# Altium PCB Lambda-Sensor-Driver.PcbDoc
Units mm, origin at the board's own origin, x right, y up, seen from the top; angles counter-clockwise.
Board outline 78 x 67 mm, 2 copper layers (Top Layer, Bottom Layer), stack 1.544 mm thick; 52 components, 45 nets, 190 pads, 16 vias.
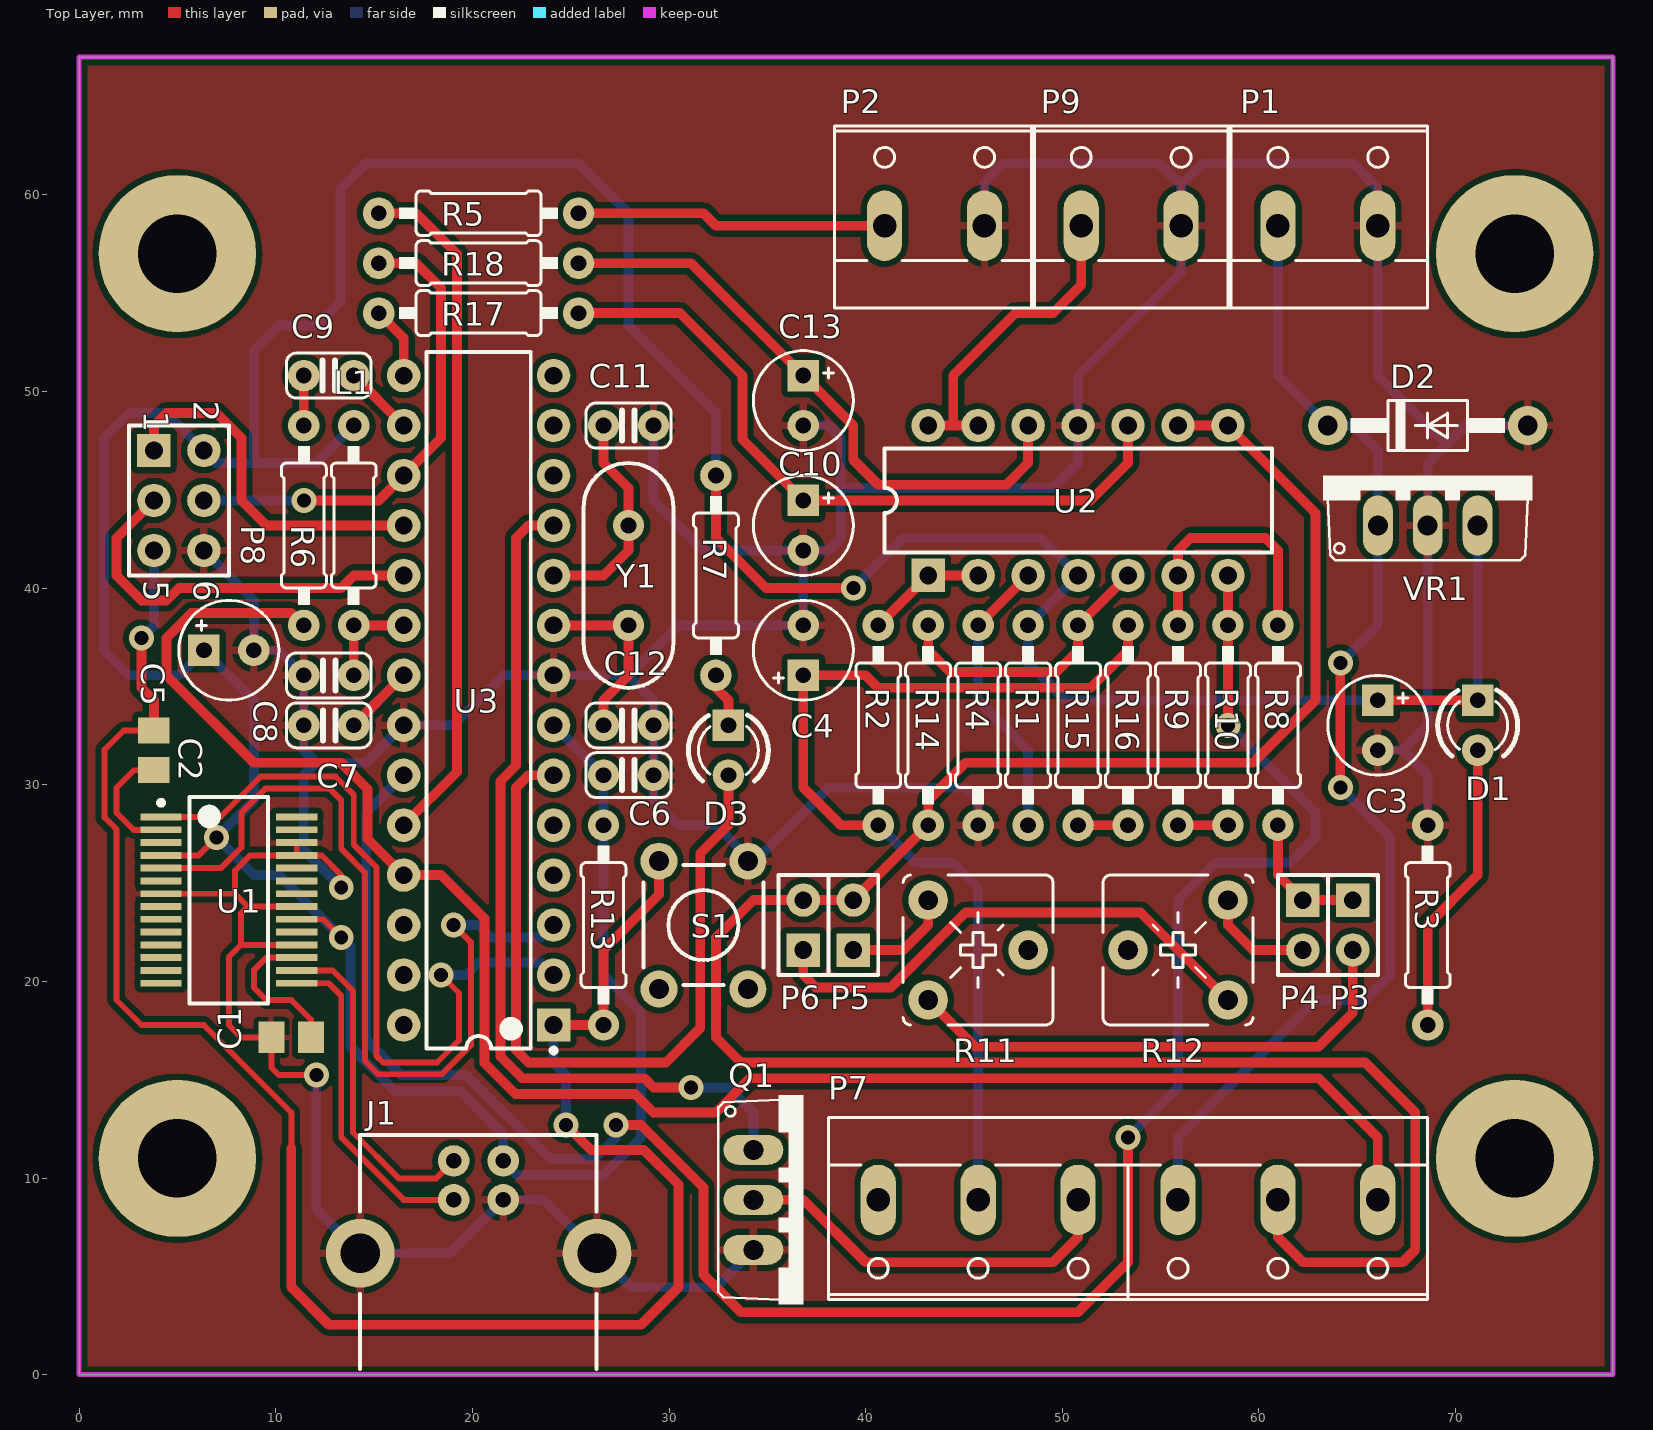
[diagram p0: Top Layer view]
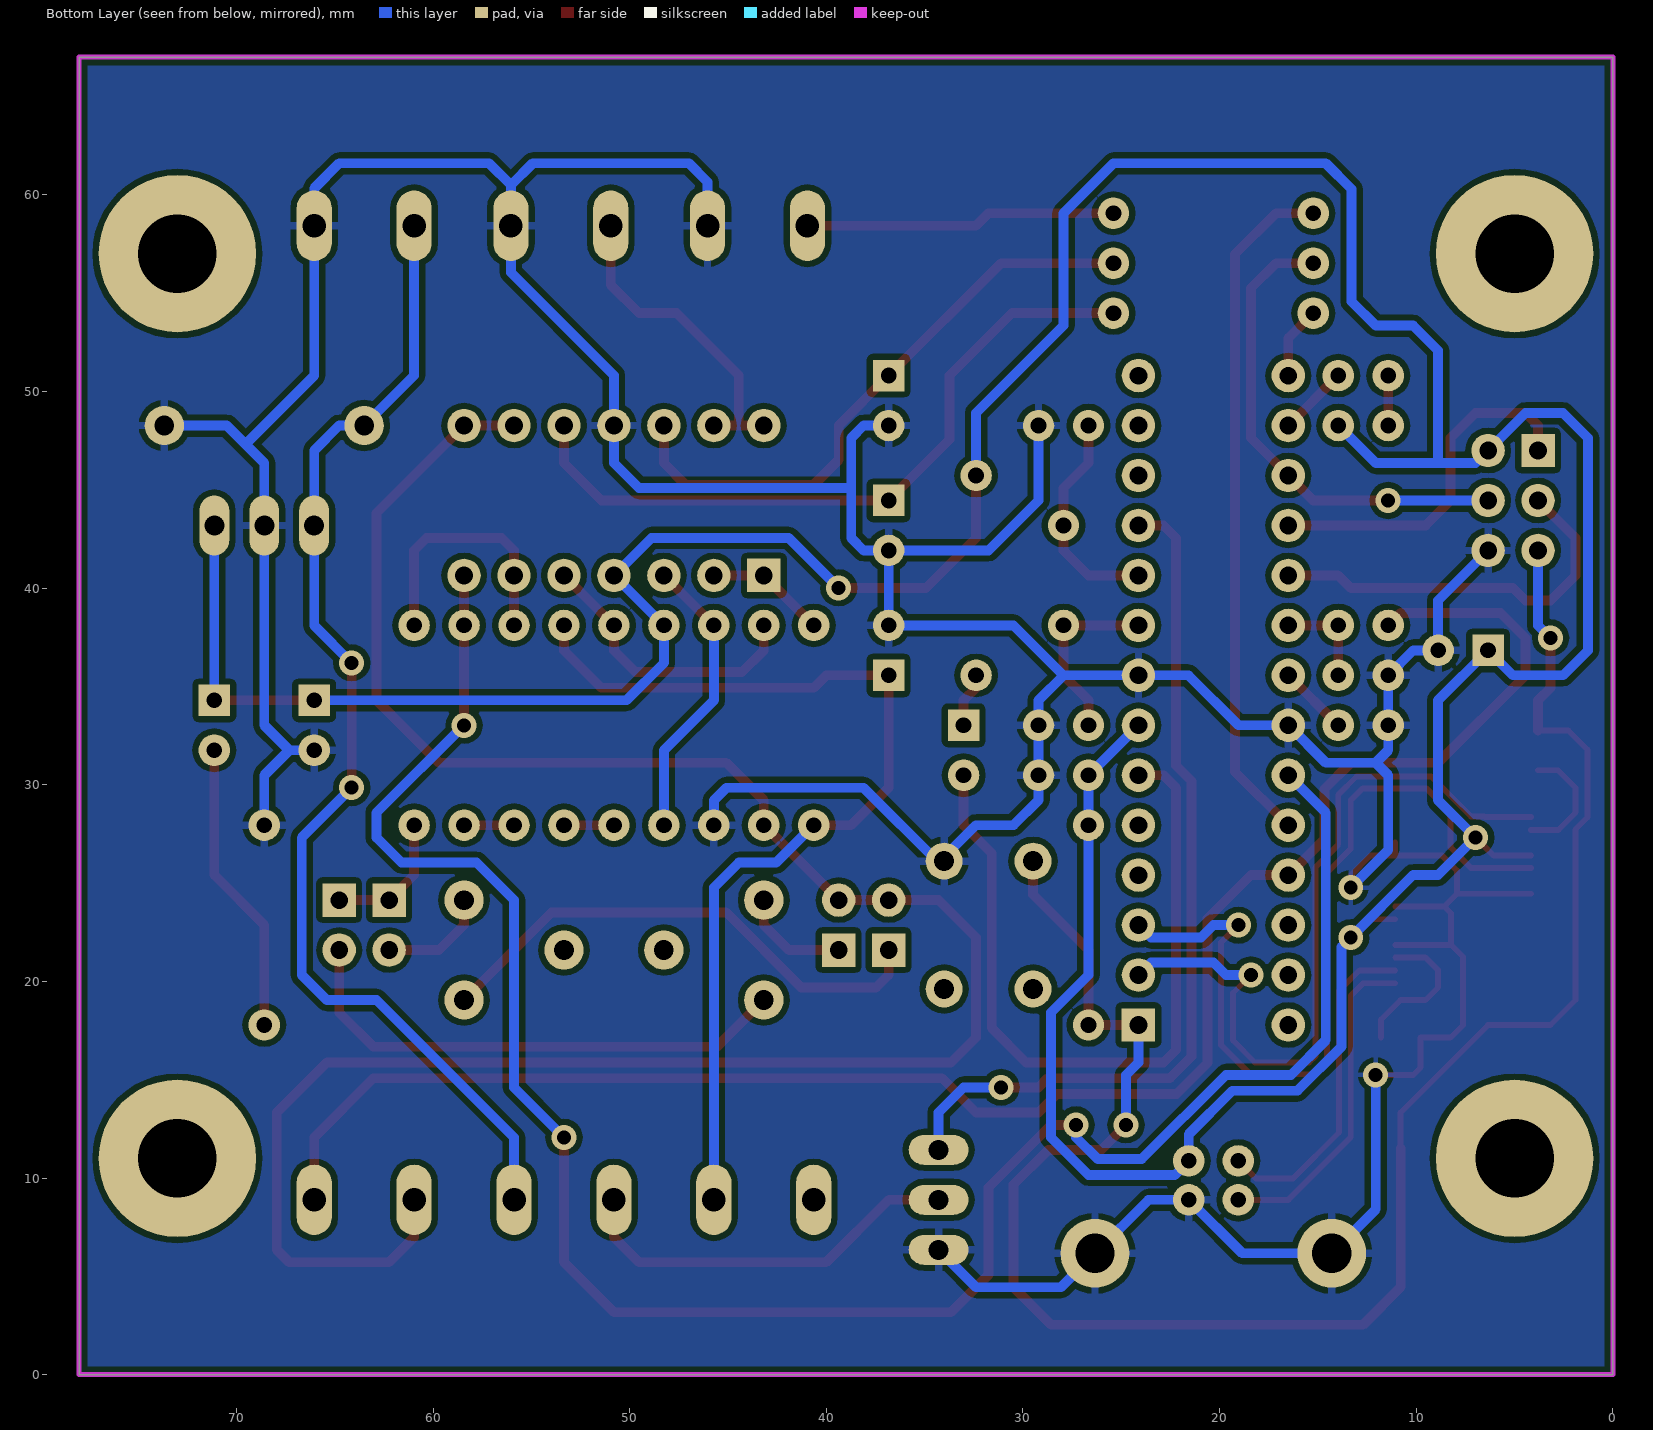
[diagram p1: Bottom Layer view, seen from below]

## Layer stack, top to bottom
Top Solder: solder mask 0.0102, Solder Resist, Dk 3.5
Top Layer: signal copper 0.0356
Dielectric 1: dielectric 1.4732, FR-4, Dk 4.8
Bottom Layer: signal copper 0.0356
Bottom Solder: solder mask 0.0102, Solder Resist, Dk 3.5

## Board outline
0,0 0,67 78,67 78,0

## Design rules (kind name [scope] priority, off if disabled: settings)
Clearance Clearance_2 [InNamedPolygon('Bottom - GND')] p1: gap=0.3 ignorepadtopadclearanceinfootprint=FALSE
Clearance Clearance_1 [InNamedPolygon('Top - GND')] p2: gap=0.3 ignorepadtopadclearanceinfootprint=FALSE
Clearance [All] p3: gap=0.3 ignorepadtopadclearanceinfootprint=FALSE
ComponentClearance [All] p1: gap=0 collisioncheckmode=3 verticalgap=0 showdistances=FALSE
PolygonConnect PolygonConnect_2 [All vs IsNamedPolygon('Top - GND')] p1: thpad.connectstyle=Relief thpad.reliefconductorwidth=0.4 thpad.reliefentries=4 thpad.polygonreliefangle="90 Angle" thpad.airgapwidth=0.3 smdpad.connectstyle=Relief smdpad.reliefconductorwidth=0.254 smdpad.reliefentries=4 smdpad.polygonreliefangle="90 Angle" smdpad.airgapwidth=0.254 via.connectstyle=Relief via.reliefconductorwidth=0.254 via.reliefentries=4 via.polygonreliefangle="90 Angle" via.airgapwidth=0.254
PolygonConnect PolygonConnect_1 [All vs IsNamedPolygon('Bottom - GND')] p2: thpad.connectstyle=Relief thpad.reliefconductorwidth=0.4 thpad.reliefentries=4 thpad.polygonreliefangle="90 Angle" thpad.airgapwidth=0.3 smdpad.connectstyle=Relief smdpad.reliefconductorwidth=0.254 smdpad.reliefentries=4 smdpad.polygonreliefangle="90 Angle" smdpad.airgapwidth=0.254 via.connectstyle=Relief via.reliefconductorwidth=0.254 via.reliefentries=4 via.polygonreliefangle="90 Angle" via.airgapwidth=0.254
PolygonConnect [All] p3: connectstyle=Relief reliefconductorwidth=0.254 reliefentries=4 polygonreliefangle="90 Angle" airgapwidth=0.254
RoomDefinition Lambda-Sensor-Driver [InComponentClass('Lambda-Sensor-Driver')] p1: confinementstyle=ConfineIn formatcopy=TRUE lockcomponents=FALSE outline -0.143,-6.35 78,-6.35 78,67.31 -0.143,67.31
RoutingVias [All] p1: holewidth=0.711 width=1.27 viastyle="Through Hole" minholewidth=0.711 minwidth=1.27 maxholewidth=0.711 maxwidth=1.27
SolderMaskExpansion [All] p1: expansion=0.102
Width [All] p1: maxlimit=1 minlimit=0.3 preferedwidth=0.5
29 further rules are at their usual default settings.

## Components (designator, comment, footprint, x,y, rotation, side; value= is the part's Value field where it differs from the comment)
C1 "100nF" C0805 10.795,17.145 r180 top
C2 "100nF" C0805 3.81,31.75 r270 top
C3 "10uF" E2,5-5 66.04,33.02 r270 top
C4 "10uF" E2,5-5 36.83,36.83 r90 top
C5 "100uF" E2,5-5 7.62,36.83 r0 top
C6 "100nF" C025-024X044 27.94,30.48 r180 top
C7 "100nF" C025-024X044 12.7,33.02 r0 top
C8 "100nF" C025-024X044 12.7,35.56 r0 top
C9 "100nF" C025-024X044 12.7,50.8 r180 top
C10 "1uF" E2,5-5 36.83,43.18 r270 top
C11 "22pF" C025-024X044 27.94,48.26 r180 top
C12 "22pF" C025-024X044 27.94,33.02 r180 top
C13 "1uF" E2,5-5 36.83,49.53 r270 top
D1 "LED0" LED3MM 71.12,33.02 r270 top
D2 "1N4002" DO41-10 68.58,48.26 r0 top
D3 "LED0" LED3MM 33.02,31.75 r270 top
J1 "Type B" USB-B-PTH 20.32,8.89 r90 top
L1 "10uH" 0207/10 13.97,43.18 r90 top
P1 "Header 2" W237-132 63.5,59.055 r0 top
P2 "Header 2" W237-132 43.5,59.055 r0 top
P3 "Header 2" HDR1X2 64.77,24.13 r270 top
P4 "Header 2" HDR1X2 62.23,24.13 r270 top
P5 "Header 2" HDR1X2 39.37,21.59 r90 top
P6 "Header 2" HDR1X2 36.83,21.59 r90 top
P7 "Header 5" W237-6P 53.34,8.255 r180 top
P8 "Header 3X2" HDR2X3 3.81,46.99 r270 top
P9 "Header 2" W237-132 53.5,59.055 r0 top
Q1 "IRF640N" TO220V 36.83,8.89 r270 top
R1 "18K" 0207/10 48.26,33.02 r90 top
R2 "100" 0207/10 40.64,33.02 r90 top
R3 "220" 0207/10 68.58,22.86 r270 top
R4 "10K" 0207/10 45.72,33.02 r90 top
R5 "22K" 0207/10 20.32,59.055 r180 top
R6 "6K8" 0207/10 11.43,43.18 r90 top
R7 "330" 0207/10 32.385,40.64 r270 top
R8 "22K" 0207/10 60.96,33.02 r270 top
R9 "12K" 0207/10 55.88,33.02 r90 top
R10 "100K" 0207/10 58.42,33.02 r270 top
R11 "300" CA6V 45.72,21.59 r270 top
R12 "300" CA6V 55.88,21.59 r90 top
R13 "10K" 0207/10 26.67,22.86 r270 top
R14 "22K" 0207/10 43.18,33.02 r270 top
R15 "12K" 0207/10 50.8,33.02 r90 top
R16 "100K" 0207/10 53.34,33.02 r270 top
R17 "10K" 0207/10 20.32,53.975 r0 top
R18 "10K" 0207/10 20.32,56.515 r0 top
S1 "SW-PB" TACTILE-PTH 31.75,22.86 r270 top
U1 "FT232RL-Tube" SSOP-28_N 7.62,24.13 r0 top
U2 "LM324AN" 646-06 50.8,44.45 r0 top
U3 "ATmega328P-PU" 28P3 20.32,34.29 r180 top
VR1 "Volt Reg" TO220V 68.58,45.72 r0 top
Y1 "16MHz" HC49US 27.94,40.64 r90 top

## Footprints (in the part's own frame and the unit in brackets; to place one, negate y for a bottom-side part, rotate by r counter-clockwise, add the part's x,y. Pads: shape width x height; smd on the part's side, far side on the other; paste and mask are expansions set on the pad)
28P3 [mm] "DIP, 28-Leads, Row Spacing 7.62mm, Pitch 2.54mm, Body 34.67x7.3mm"
  rect 1.7x1.7 hole 0.9: 1(-3.81,16.51)
  round 1.7 hole 0.9: 2(-3.81,13.97) 3(-3.81,11.43) 4(-3.81,8.89) 5(-3.81,6.35) 6(-3.81,3.81) 7(-3.81,1.27) 8(-3.81,-1.27) 9(-3.81,-3.81) 10(-3.81,-6.35) 11(-3.81,-8.89) 12(-3.81,-11.43) 13(-3.81,-13.97) 14(-3.81,-16.51) 15(3.81,-16.51) 16(3.81,-13.97) 17(3.81,-11.43) 18(3.81,-8.89) 19(3.81,-6.35) 20(3.81,-3.81) 21(3.81,-1.27) 22(3.81,1.27) 23(3.81,3.81) 24(3.81,6.35) 25(3.81,8.89) 26(3.81,11.43) 27(3.81,13.97) 28(3.81,16.51)
  silkscreen extent -3.94,-17.7 2.65,17.93, body extent -3.6,-17.65 3.6,17.65, height 4.58
0207/10 [mm]
  round 1.6 hole 0.8: 1(-5.08,0) 2(5.08,0)
  silkscreen extent -4.04,-1.14 4.04,1.14
646-06 [mm] "DIP; 14 Leads; Row Spacing 7.62 mm; Pitch 2.54 mm"
  rect 1.7x1.7 hole 0.9: 1(-7.62,-3.81)
  round 1.7 hole 0.9: 2(-5.08,-3.81) 3(-2.54,-3.81) 4(0,-3.81) 5(2.54,-3.81) 6(5.08,-3.81) 7(7.62,-3.81) 8(7.62,3.81) 9(5.08,3.81) 10(2.54,3.81) 11(0,3.81) 12(-2.54,3.81) 13(-5.08,3.81) 14(-7.62,3.81)
  silkscreen extent -9.85,-2.65 9.85,2.65
C025-024X044 [mm]
  round 1.6 hole 0.8: 1(-1.27,0) 2(1.27,0)
  silkscreen extent -2.16,-1.14 2.16,1.14
C0805 [mil]
  rect 52x63 smd: 1(-39.37,0) 2(40,0)
  body extent -39,-25 39,25, height 31
CA6V [mm]
  round 2 hole 1: 1(-2.54,-2.54) 2(2.54,-2.54) 3(0,2.54)
  silkscreen extent -3.81,-3.81 3.81,3.81
DO41-10 [mm]
  round 2 hole 1: 1(5.08,0) 2(-5.08,0)
  silkscreen extent -3.94,-1.27 3.94,1.27
E2,5-5 [mil]
  rect 63x63 hole 31.5: 1(-50,0)
  round 63 hole 31.5: 2(50,0)
  silkscreen extent -100,-100 100,100
HC49US [mm]
  round 1.6 hole 0.8: 1(-2.54,0) 2(2.54,0)
  silkscreen extent -5.71,-2.29 5.71,2.29, body extent -5.55,-2.32 5.62,2.35, height 3.63
HDR1X2 [mm] "Connector; Header; 2 Position"
  rect 1.7x1.7 hole 0.9: 1(0,0)
  round 1.7 hole 0.9: 2(2.54,0)
  silkscreen extent -1.27,-1.27 3.81,1.27
HDR2X3 [mm] "Connector; Header; 3x2 Position"
  rect 1.7x1.7 hole 0.9: 1(0,0)
  round 1.7 hole 0.9: 2(0,2.54) 3(2.54,0) 4(2.54,2.54) 5(5.08,0) 6(5.08,2.54)
  silkscreen extent -1.27,-1.27 6.35,3.81
LED3MM [mm]
  rect 1.6x1.6 hole 0.8: 1(-1.27,0)
  round 1.6 hole 0.8: 2(1.27,0)
  silkscreen extent -1.79,-2.03 1.57,2.03
SSOP-28_N [mm] "SOP, 28-Leads, Body 10.2x5.3mm, Pitch 0.65mm, IPC Medium Density"
  rect 2.1x0.35 smd: 1(-3.45,4.225) 2(-3.45,3.575) 3(-3.45,2.925) 4(-3.45,2.275) 5(-3.45,1.625) 6(-3.45,0.975) 7(-3.45,0.325) 8(-3.45,-0.325) 9(-3.45,-0.975) 10(-3.45,-1.625) 11(-3.45,-2.275) 12(-3.45,-2.925) 13(-3.45,-3.575) 14(-3.45,-4.225) 15(3.45,-4.225) 16(3.45,-3.575) 17(3.45,-2.925) 18(3.45,-2.275) 19(3.45,-1.625) 20(3.45,-0.975) 21(3.45,-0.325) 22(3.45,0.325) 23(3.45,0.975) 24(3.45,1.625) 25(3.45,2.275) 26(3.45,2.925) 27(3.45,3.575) 28(3.45,4.225)
  silkscreen extent -3.57,-5.25 2,5.25, body extent -2.8,-5.25 2.8,5.25, height 2
TACTILE-PTH [mil]
  round 74 hole 40: 1(-128,89) 2(-128,-89) 3(128,89) 4(128,-89)
  silkscreen extent -120,-120 120,120
TO220V [mil]
  oval 60x120 hole 40: 1(-100,-100) 2(0,-100) 3(100,-100)
  silkscreen extent -210,-170 210,0
USB-B-PTH [mm]
  round 1.6 hole 0.8: 1(1.981,-1.25) 2(1.981,1.27) 3(0,1.27) 4(0,-1.25)
  round 3.5 hole 2: 5(-2.718,-6.02) 6(-2.718,6.02)
  silkscreen extent -8.6,-6 3.3,6.02, body extent -12.7,-6 4.3,6, height 11
W237-6P [mil]
  oval 70.5x141 hole 47: 1(-500,-25) 2(-300,-25) 3(-100,-25) 4(100,-25) 5(300,-25) 6(500,-25)
  silkscreen extent -600,-190 600,175, body extent -597,-213 597,200, height 551
W237-132 [mil]
  oval 70.5x141 hole 47: 1(-100,-25) 2(100,-25)
  silkscreen extent -200,-190 200,175, body extent -197,-213 197,200, height 551

## Part data
C1 C2 C6 C7 C8 C9 C11 C12: library part Cap, "Capacitor", LatestRevisionDate=17-Jul-2002, LatestRevisionNote="Re-released for DXP Platform.", PackageDescription="Radial Cap, Thru-Hole; 2 Leads; 0.3 in Pin Spacing", PackageReference=RAD-0.3, Published=8-Jun-2000, Publisher="Altium Limited"
C3 C4 C5 C10 C13: library part "Cap Pol1", "Polarized Capacitor (Radial)", LatestRevisionDate=17-Jul-2002, LatestRevisionNote="Re-released for DXP Platform.", PackageDescription="Polarized Capacitor (Radial); 2 Leads", PackageReference=RB7.6-15, Published=8-Jun-2000, Publisher="Altium Limited"
D1 D3: "Typical INFRARED GaAs LED", LatestRevisionDate=08-Jul-2005, LatestRevisionNote="Mech Layer 1 removed.", PackageDescription="LED; 2 Leads", PackageReference=LED-0, Published=8-Jun-2000, Publisher="Altium Limited"
D2: library part Diode, "Default Diode", Code_JEDEC=DO-214-AB, LatestRevisionDate=17-Jul-2002, LatestRevisionNote="Re-released for DXP Platform.", PackageDescription="DO-214-AB/SMC; 2 C-Bend Leads; Body 7.9 x 5.9 mm, inc. leads (LxW)", PackageReference=SMC, PackageVersion=Sep-1996, Published=8-Jun-2000, Publisher="Altium Limited"
J1: library part USB, Category=Connector, Link=http://www.sfe-electronics.com/product.php?category=12&product_id=156, Price=2250, Type=USB
L1: library part Inductor, "Inductor", Code_IEC=1005, Code_JEITA=0402, LatestRevisionDate=29-May-2009, LatestRevisionNote="IPC-7351 Footprint Added.", PackageDescription="Chip Inductor", PackageReference=0402-A, Published=8-Jun-2000, Publisher="Altium Limited"
P1 P2 P3 P4 P5 P6 P9: "Header, 2-Pin", LatestRevisionDate=17-Jul-2002, LatestRevisionNote="Re-released for DXP Platform.", Publisher="Altium Limited"
P7: "Header, 5-Pin", LatestRevisionDate=17-Jul-2002, LatestRevisionNote="Re-released for DXP Platform.", Publisher="Altium Limited"
P8: "Header, 3-Pin, Dual row", LatestRevisionDate=17-Jul-2002, LatestRevisionNote="Re-released for DXP Platform.", Publisher="Altium Limited"
Q1: library part MOSFET-N, "N-Channel MOSFET", LatestRevisionDate=17-Jul-2002, LatestRevisionNote="Re-released for DXP Platform.", PackageDescription="TO, Flat Index; 3 In-Line, Axial Leads; Body Dia. 4.6mm; Lead Dia. 0.5 mm (max)", PackageReference=E3, PackageVersion=1995/1996, Published=8-Jun-2000, Publisher="Altium Limited"
R1 R2 R3 R4 R5 R6 R7 R8 R9 R10 R13 R14 R15 R16 R17 R18: library part Res1, "Resistor", LatestRevisionDate=17-Jul-2002, LatestRevisionNote="Re-released for DXP Platform.", PackageDescription="Axial Device, Thru-Hole; 2 Leads; 0.3 in Pin Spacing", PackageReference=AXIAL-0.3, Published=8-Jun-2000, Publisher="Altium Limited"
R11 R12: library part "Res Adj1", "Variable Resistor", LatestRevisionDate=17-Jul-2002, LatestRevisionNote="Re-released for DXP Platform.", PackageDescription="Axial Device, Thru-Hole; 2 Leads; 0.7 in Pin Spacing", PackageReference=AXIAL-0.7, Published=8-Jun-2000, Publisher="Altium Limited", Set Position=0.5
S1: "Switch", LatestRevisionDate=17-Jul-2002, LatestRevisionNote="Re-released for DXP Platform.", PackageDescription="Switch; 2 Leads", PackageReference=SPST-2, Published=24-Mar-1999, Publisher="Altium Limited"
U1: "USB UART Asynchronous Serial Data Transfer Chip, SSOP-28, Tube", ComponentLink1Description="Manufacturer Link", ComponentLink1URL=http://www.ftdichip.com/Products/ICs/FT232R.htm, ComponentLink2Description=Datasheet, ComponentLink2URL=http://www.ftdichip.com/Support/Documents/DataSheets/ICs/DS_FT232R.pdf, DatasheetVersion="ver 2.07, Jul-2010", PackageDescription="28-Pin Small Outline Package 0.65 mm Pitch", PackageReference=SSOP-28, PackageVersion=2010, Published=19-Aug-2010, Publisher="Altium Limited"
U2: "Quad Low-Power Operational Amplifier", ComponentLink1Description="Manufacturer Link", ComponentLink1URL=http://www.onsemi.com/site/products/parametrics/0,4446,251,00.html, ComponentLink2Description=Datasheet, ComponentLink2URL=http://www.onsemi.com/pub/Collateral/LM324-D.PDF, DatasheetVersion=1988, LatestRevisionDate=06-Jun-2005, LatestRevisionNote="Stylized 3D Model Added.", PackageDescription="DIP; 14 Leads; Row Spacing 7.62 mm; Pitch 2.54 mm", PackageReference=646-06, PackageVersion=1997, Published=17-Jul-2002, Publisher="Altium Limited"
U3: "8-bit AVR Microcontroller, 32KB Flash, 1KB EEPROM, 2KB SRAM, 28-pin PDIP, Industrial Grade (-40°C to 85°C)", Supplier Part Number 1=ATMEGA328P-PU-ND, ComponentLink1Description="Manufacturer Link", ComponentLink1URL=http://www.atmel.com/products/avr/default.asp?, ComponentLink2Description="ATmega48A/48PA/88A/88PA/168A/168PA/328/328P Datasheet", ComponentLink2URL=http://www.atmel.com/dyn/resources/prod_documents/8271.pdf, ComponentLink3Description="ATmega48A/48PA/88A/88PA/168A/168PA/328/328P Summary", ComponentLink3URL=http://www.atmel.com/dyn/resources/prod_documents/8271S.pdf, ComponentLink4Description="Atmel.com Home", ComponentLink4URL=http://www.atmel.com, DatasheetVersion="revA, Jan-2010", PackageDescription="28-lead (0.300\"/7.62mm Wide) Plastic Dual Inline Package (PDIP)", PackageReference=28P3, PackageVersion="revB, Sep-2001", Published=1-Apr-2010, Publisher="Altium Limited", Supplier 1=Digi-Key, Supplier 2=Farnell, Supplier 3=Mouser, Supplier Part Number 2=1715487, Supplier Part Number 3=556-ATMEGA328P-PU
VR1: "Voltage Regulator", LatestRevisionDate=29-May-2009, LatestRevisionNote="IPC-7351 Footprint Added.", PackageDescription="3-Pin Transistor Outline Package 2.54 mm Pitch, 15.1 mm Lead Span", PackageReference=D2PAK, Published=24-Mar-1999, Publisher="Altium Limited"
Y1: library part XTAL, "Crystal Oscillator", LatestRevisionDate=17-Jul-2002, LatestRevisionNote="Re-released for DXP Platform.", PackageDescription="Crystal, Thru-Hole; 2 Leads; Body 3.1 x 8.2 mm (Dia.xH)", PackageReference=R38, Published=8-Jun-2000, Publisher="Altium Limited"

## Free pads (board coordinates)
  round 8 hole 4: ""(5,11) ""(5,57) ""(73,11) ""(73,57)

## Via types
v1: diameter 1.27, hole 0.711, Top Layer to Bottom Layer, 16 vias

## Nets (pads, with @x,y where several pads share a name; then routed paths per layer and width w, separated by ;. In a path a pad name is that pad's centre, name@x,y a point inside that pad or via, vN(x,y) a via of type N, cw(c..) or ccw(c..) an arc to the next point about the centre after c; other vN are vias at no path point)
12V: D2.2 P1.1 P7.3 VR1.1 | length 60.2
  Top Layer w0.5: v1(64.135,29.845) v1(64.135,36.195)
  Bottom Layer w0.5: P7.3 55.88,12.065 62.865,19.05 65.405,19.05 66.675,20.32 66.675,27.305 v1(64.135,29.845) ; P1.1 60.96,50.8 D2.2 64.77,48.26 66.04,46.99 VR1.1 66.04,38.1 v1(64.135,36.195)
AUX_INPUT: R5.2 U3.24 | length 35
  Top Layer w0.5: R5.2 17.145,59.055 19.215,56.985 19.215,30.645 U3.24
GND: C1.2 C3.2 C4.2 C5.2 C6.1 C7.1 C8.1 C10.2 C11.1 C12.1 C13.2 D2.1 J1.4 J1.5 J1.6 P1.2 P2.2 P8.6 P9.2 Q1.3 R3.1 R4.1 S1.1 U1.7 U1.18 U1.21 U1.25 U1.26 U2.11 U3.8 U3.22 VR1.2 | length 261.7
  Top Layer w0.3: U1.7 7.93,24.455 ; U1.18 8.236,21.855 ; U1.21 8.58,23.805 ; U1.26 U1.25 ; v1(12.065,15.24) 10.16,15.24 9.779,15.621 C1.2 8.255,17.145 7.62,17.78 7.62,21.239 8.236,21.855 ; v1(13.335,24.765) 13.335,25.4 12.33,26.405 U1.25 ; 7.93,24.455 8.58,23.805 ; 7.93,24.455 7.93,25.63 8.705,26.405 U1.25 ; 8.236,21.855 8.236,23.461 8.58,23.805
  Bottom Layer w0.5: P8.6 8.89,39.37 C5.2 10.16,36.83 C8.1 C7.1 11.43,31.75 12.065,31.115 ; v1(12.065,15.24) 12.065,8.407 J1.6 18.852,6.172 J1.4 23.622,8.89 J1.5 28.067,4.445 32.385,4.445 Q1.3 ; v1(13.335,24.765) 11.43,26.67 11.43,30.48 12.065,31.115 ; C11.1 29.21,44.45 31.75,41.91 C10.2 ; C13.2 38.1,48.26 38.735,47.625 38.735,45.085 ; R4.1 45.72,29.21 45.085,29.845 38.1,29.845 34.29,26.035 32.385,27.94 30.48,27.94 29.21,29.21 C6.1 C12.1 29.21,34.29 27.94,35.56 ; P2.2 46.04,60.645 46.99,61.595 54.93,61.595 56.04,60.485 ; C3.2 67.31,31.75 ; R3.1 68.58,30.48 67.31,31.75 ; D2.1 70.485,48.26 69.532,47.307 ; 12.065,31.115 14.605,31.115 U3.22 19.05,33.02 21.59,35.56 U3.8 27.94,35.56 ; 27.94,35.56 30.48,38.1 C4.2 C10.2 ; C10.2 38.1,41.91 38.735,42.545 38.735,45.085 ; 38.735,45.085 49.53,45.085 50.8,46.355 U2.11 50.8,50.8 56.04,56.04 56.04,60.485 ; 56.04,60.485 57.15,61.595 64.77,61.595 66.04,60.325 P1.2 66.04,50.8 69.532,47.307 ; 67.31,31.75 68.58,33.02 VR1.2 68.58,46.355 69.532,47.307
HEATER: P7.4 Q1.2 | length 20.3
  Top Layer w0.5: Q1.2 36.83,8.89 40.005,5.715 49.53,5.715 50.8,6.985 P7.4
HTR_CTL: Q1.1 U3.11 | length 44.8
  Top Layer w0.5: U3.11 22.86,43.18 22.225,42.545 22.225,30.976 21.425,30.176 21.425,16.179 22.529,15.075 28.74,15.075 29.21,14.605 v1(31.115,14.605)
  Bottom Layer w0.5: v1(31.115,14.605) 33.02,14.605 34.29,13.335 Q1.1
LED: D3.2 U3.6 | length 39.3
  Top Layer w0.5: U3.6 22.86,30.48 22.225,29.845 22.225,16.51 22.86,15.875 29.845,15.875 31.585,17.615 31.585,26.505 33.02,27.94 D3.2
MISO: P8.1 U3.18 | length 18.5
  Top Layer w0.5: P8.1 3.81,48.26 4.445,48.895 6.985,48.895 8.255,47.625 8.255,44.45 9.525,43.18 U3.18
MOSI: P8.4 R18.1 U3.17 | length 24.7
  Top Layer w0.5: v1(11.43,44.45) 15.24,44.45 U3.17 18.415,47.625 18.415,55.245 17.145,56.515 R18.1
  Bottom Layer w0.5: P8.4 v1(11.43,44.45)
NERNST: P7.1 R6.1 U3.25 | length 91.4
  Top Layer w0.5: R6.1 10.795,38.735 5.715,38.735 4.445,37.465 4.445,35.56 8.89,31.115 13.335,31.115 14.67,29.78 14.67,27.24 U3.25 18.415,25.4 20.625,23.19 20.625,15.847 22.197,14.275 28.27,14.275 29.21,13.335 32.385,13.335 34.125,15.075 63.03,15.075 66.04,12.065 P7.1
NetC1_1: C1.1 U1.17 | length 7.8
  Top Layer w0.3: U1.17 9.525,21.205 8.89,20.57 8.89,19.685 9.525,19.05 10.795,19.05 11.795,18.05 C1.1
NetC2_2: C2.2 U1.2 | length 6.2
  Top Layer w0.3: C2.2 2.794,30.734 1.905,29.845 1.905,28.575 2.775,27.705 U1.2
NetC7_2: C7.2 U3.21 | length 3.6
  Top Layer w0.5: C7.2 U3.21
NetC8_2: C8.2 L1.1 U3.20 | length 5.1
  Top Layer w0.5: C8.2 L1.1 U3.20
NetC9_2: C9.2 R6.2 | length 2.5
  Top Layer w0.5: R6.2 C9.2
NetC10_1: C10.1 R17.2 U2.10 | length 36.5
  Top Layer w0.5: R17.2 30.56,53.975 33.735,50.8 33.735,47.545 C10.1 51.435,44.45 53.34,46.355 U2.10
NetC13_1: C13.1 R18.2 U2.12 | length 30.9
  Top Layer w0.5: R18.2 31.115,56.515 C13.1 39.37,48.26 39.37,46.52 40.64,45.25 47.155,45.25 48.26,46.355 U2.12
NetD1_2: D1.2 R3.2 | length 15
  Top Layer w0.5: R3.2 68.58,22.86 71.12,25.4 D1.2
NetD3_1: D3.1 R7.2 | length 2.8
  Top Layer w0.5: R7.2 32.385,34.925 33.02,34.29 D3.1
NetJ1_2: J1.2 U1.16 | length 16.9
  Top Layer w0.3: U1.16 12.899,20.555 13.935,19.519 13.935,12.314 16.264,9.985 18.163,9.985 J1.2
NetJ1_3: J1.3 U1.15 | length 16.8
  Top Layer w0.3: U1.15 12.7,19.905 13.335,19.27 13.335,12.065 16.51,8.89 J1.3
NetP2_1: P2.1 R5.1 | length 15.8
  Top Layer w0.5: R5.1 31.75,59.055 32.385,58.42 P2.1
NetP3_1: P3.1 P4.1 R8.2 | length 6.9
  Top Layer w0.5: R8.2 60.96,25.4 P4.1 P3.1
NetP3_2: P3.2 R11.2 | length 26.5
  Top Layer w0.5: R11.2 45.555,16.675 63.03,16.675 64.77,18.415 P3.2
NetP4_2: P4.2 R12.2 | length 5.6
  Top Layer w0.5: R12.2 58.42,22.86 59.69,21.59 P4.2
NetP5_1: P5.1 R11.1 | length 5.6
  Top Layer w0.5: P5.1 41.91,21.59 43.18,22.86 R11.1
NetP6_1: P6.1 R12.1 | length 26.5
  Top Layer w0.5: P6.1 36.83,20.32 37.465,19.685 41.275,19.685 45.085,23.495 53.975,23.495 R12.1
NetR1_1: R1.1 R4.2 U2.3 | length 14.8
  Top Layer w0.5: R4.2 U2.3
  Bottom Layer w0.5: R4.2 45.72,34.29 48.26,31.75 R1.1
NetR2_2: R2.2 U2.1 U2.2 | length 6.1
  Top Layer w0.5: R2.2 U2.1 U2.2
NetR8_1: R8.1 R9.2 U2.6 | length 13.2
  Top Layer w0.5: R9.2 U2.6 55.88,41.91 56.515,42.545 60.325,42.545 60.96,41.91 R8.1
NetR9_1: R9.1 R10.2 | length 2.5
  Top Layer w0.5: R9.1 R10.2
NetR14_1: R14.1 R15.2 U2.5 | length 14.7
  Top Layer w0.5: R14.1 43.18,36.83 44.285,35.725 49.695,35.725 50.8,36.83 R15.2 U2.5
NetR15_1: R15.1 R16.2 | length 2.5
  Top Layer w0.5: R15.1 R16.2
OUT_DAC: P9.1 U2.13 U2.14 | length 16.5
  Top Layer w0.5: U2.14 44.45,48.26 ; U2.13 44.45,48.26 ; P9.1 50.96,55.405 49.53,53.975 47.625,53.975 44.45,50.8 44.45,48.26
PUMP: P5.2 P6.2 P7.2 R14.2 U2.8 U2.9 | length 113.5
  Top Layer w0.5: U2.9 U2.8 62.865,43.815 62.865,34.29 59.69,31.115 45.085,31.115 43.18,29.21 R14.2 P5.2 P6.2 34.29,24.13 32.385,22.225 32.385,17.145 33.655,15.875 65.405,15.875 67.945,13.335 67.945,6.35 67.31,5.715 62.23,5.715 60.96,6.985 P7.2
PUMP_ADC: R10.1 U2.7 U3.23 | length 107.1
  Top Layer w0.5: v1(27.305,12.7) 28.575,12.7 31.75,9.525 31.75,5.08 33.655,3.175 50.8,3.175 53.34,5.715 v1(53.34,12.065) ; v1(58.42,33.02) R10.1 U2.7
  Bottom Layer w0.5: U3.23 14.605,28.575 14.605,17.006 16.371,15.24 19.685,15.24 23.965,10.96 26.2,10.96 27.305,12.065 v1(27.305,12.7) ; v1(53.34,12.065) 55.88,14.605 55.88,24.13 57.785,26.035 61.595,26.035 62.865,27.305 62.865,28.575 v1(58.42,33.02)
PUMP_CTL: R17.1 U3.15 | length 3.7
  Top Layer w0.5: R17.1 16.51,52.705 U3.15
RST: C2.1 P8.5 R13.2 S1.2 U3.1 | length 96.6
  Top Layer w0.3: C2.1 2.27,32.75 1.305,31.785 1.305,28.326 1.905,27.726 1.905,19.05 3.175,17.78 6.35,17.78 10.795,13.335 10.795,11.498
  Top Layer w0.5: v1(3.175,37.465) 3.175,34.925 3.81,34.29 C2.1 ; 10.795,11.498 10.795,4.445 12.7,2.54 28.575,2.54 30.48,4.445 30.48,9.664 28.714,11.43 26.035,11.43 v1(24.765,12.7) ; U3.1 R13.2 26.67,21.59 29.489,24.409 S1.2
  Bottom Layer w0.5: v1(3.175,37.465) 3.81,38.1 P8.5 ; U3.1 24.13,15.875 24.765,15.24 v1(24.765,12.7)
RXD: U1.5 U3.3 | length 44.3
  Top Layer w0.3: U1.5 7.207,25.755 8.255,26.803 8.255,28.575 9.495,29.815 12.73,29.815 13.337,29.208 13.337,26.735 14.535,25.537 14.535,15.945 15.205,15.275 18.45,15.275 19.925,16.75 19.925,21.985 v1(19.05,22.86)
  Bottom Layer w0.5: v1(19.05,22.86) 20.32,22.86 20.955,22.225 23.495,22.225 U3.3
SCK: P8.3 U3.19 | length 20.3
  Top Layer w0.5: P8.3 1.905,42.545 1.905,40.64 3.175,39.37 4.445,39.37 5.08,40.005 13.335,40.005 13.97,40.64 U3.19
SS: C9.1 U3.16 | length 3.6
  Top Layer w0.5: C9.1 U3.16
TXD: U1.1 U3.2 | length 39.5
  Top Layer w0.3: U1.1 6.501,28.355 6.536,28.39 7.221,28.39 9.246,30.415 13.045,30.415 13.97,29.49 13.97,26.95 15.135,25.785 15.135,16.194 15.454,15.875 18.201,15.875 19.325,16.999 19.325,19.41 v1(18.415,20.32)
  Bottom Layer w0.5: v1(18.415,20.32) 19.685,20.32 20.32,20.955 23.495,20.955 U3.2
VCC: C3.1 C5.1 C6.2 D1.1 J1.1 L1.2 P8.2 R1.2 R7.1 R13.1 U1.4 U1.20 U2.4 U3.7 VR1.3 | length 216
  Top Layer w0.3: U1.4 6.085,26.405 v1(6.985,27.305) ; U1.20 12.405,23.155 v1(13.335,22.225)
  Top Layer w0.5: R7.1 32.385,42.545 34.925,40.005 v1(39.37,40.005) ; C3.1 D1.1
  Bottom Layer w0.5: L1.2 12.065,46.355 8.89,46.355 ; U3.7 C6.2 R13.1 26.67,20.32 28.575,18.415 28.575,12.065 26.67,10.16 22.281,10.16 J1.1 21.57,12.224 19.354,14.44 16.04,14.44 13.805,16.675 13.805,21.755 v1(13.335,22.225) 10.16,25.4 8.89,25.4 v1(6.985,27.305) 8.89,29.21 8.89,34.29 C5.1 5.08,35.56 2.54,35.56 1.27,36.83 1.27,47.625 2.54,48.895 4.445,48.895 P8.2 6.985,46.355 8.89,46.355 ; R7.1 32.385,48.895 27.94,53.34 27.94,59.055 25.4,61.595 14.605,61.595 13.295,60.285 13.295,54.57 12.065,53.34 10.16,53.34 8.89,52.07 8.89,46.355 ; v1(39.37,40.005) 41.91,42.545 48.895,42.545 U2.4 R1.2 48.26,36.195 50.165,34.29 C3.1 ; D1.1 VR1.3
VREF: C4.1 P7.5 R2.1 R16.1 | length 51.4
  Top Layer w0.5: R2.1 38.735,27.94 36.83,29.845 C4.1 40.005,35.56 40.64,34.925 51.435,34.925 53.34,36.83 R16.1
  Bottom Layer w0.5: R2.1 42.545,26.035 44.45,26.035 45.72,24.765 P7.5
XTAL1: C12.2 U3.9 Y1.1 | length 9.4
  Top Layer w0.5: U3.9 Y1.1 27.94,35.56 26.67,34.29 C12.2
XTAL2: C11.2 U3.10 Y1.2 | length 11.2
  Top Layer w0.5: U3.10 26.67,40.64 27.94,41.91 Y1.2 27.94,45.085 26.67,46.355 C11.2
pads on no net: P7.6 R11.3 R12.3 S1.3 S1.4 U1.3 U1.6 U1.8 U1.9 U1.10 U1.11 U1.12 U1.13 U1.14 U1.19 U1.22 U1.23 U1.24 U1.27 U1.28 U3.4 U3.5 U3.12 U3.13 U3.14 U3.26 U3.27 U3.28

## Polygon pours and split planes (outlines as drawn)
GND on Top Layer "Top - GND" (solid, remove dead copper, pour order 4): 0,0 78,0 78,67 0,67
GND on Bottom Layer "Bottom - GND" (solid, remove dead copper, pour order 0): 0,0 78,0 78,67 0,67

## Keep-outs
Keep-Out Layer:
  the board outline again, w0.254

## Text inside footprints (layer, text, board x,y; h text height)
P1: Mechanical 16 "2" at 64.186,60.274 h1.97; Mechanical 16 "1" at 59.055,60.325 h1.97
P2: Mechanical 16 "1" at 39.055,60.325 h1.97; Mechanical 16 "2" at 44.186,60.274 h1.97
P7: Mechanical 16 "6" at 42.494,6.985 h1.97 r180; Mechanical 16 "5" at 47.574,7.036 h1.97 r180; Mechanical 16 "4" at 52.705,6.985 h1.97 r180; Mechanical 16 "3" at 57.734,6.985 h1.97 r180; Mechanical 16 "2" at 62.814,7.036 h1.97 r180; Mechanical 16 "1" at 67.945,6.985 h1.97 r180
P8: Top Overlay "6" at 5.842,40.386 h1.27 r270; Top Overlay "5" at 3.302,40.386 h1.27 r270; Top Overlay "2" at 5.842,49.53 h1.27 r270; Top Overlay "1" at 3.302,49.022 h1.27 r270
P9: Mechanical 16 "2" at 54.186,60.274 h1.97; Mechanical 16 "1" at 49.055,60.325 h1.97
Q1: Mechanical 16 "3" at 33.655,6.985 h1.97 r270; Mechanical 16 "2" at 33.655,9.525 h1.97 r270; Mechanical 16 "1" at 33.655,12.065 h1.97 r270
VR1: Mechanical 16 "3" at 70.485,42.545 h1.97; Mechanical 16 "2" at 67.945,42.545 h1.97; Mechanical 16 "1" at 65.405,42.545 h1.97